# EAGLE board Boss DS1 (EAGLE 9.7.0)

Size 184.89 x 178.68 mm. Coordinates in mm from the lower left corner, seen from the top.
Outline: 0,0 184.89,0 184.89,178.68 0,178.68 0,0
Copper layers (1*16): Top 0.035mm / dielectric 1.5mm / Bottom 0.035mm
Design rules "default": minimum track width 6mil, minimum drill 0.35mm, track to track 6mil, track to pad 6mil, pad to pad 6mil, via to via 6mil, smd to smd 6mil, copper to edge 40mil, drill to drill 6mil, minimum pad ring 10mil, minimum via ring 8mil, stop-mask expansion 4mil, vias tented up to drill 0mil, thermal gap 10mil

## Footprints (pad centres in the part's own frame; a part is rotated, then mirrored left to right if it is on the bottom)
BATTERY-GENERIC = drill 1.118 pad 3.15 octagon: + 2.54,0; - -2.54,0
CAP-THRU-2.54MM = drill 1.016 pad 1.88: 1 -1.27,0; 2 1.27,0
DIODE-AXIAL = drill 1: 1 -5.08,0; 2 5.08,0
PIEZO = drill 1 pad 1.6: 1 -3.5,0; 2 3.5,0
RESAD1016W63L850D250B = drill 0.83 pad 1.43: 1 -5.08,0; 2 5.08,0
HA-06-SM065 = drill 1 pad 1.676: 1 -2.54,-2.54; 2 0,2.54; 3 2.54,-2.54
SWITCH-SPDT-PTH-8.5X3.7MM = drill 1.016 pad 1.88: 1 -2.54,0; 2 0,0; 3 2.54,0
TO92 = drill 0.813 octagon: 1 -1.27,0; 2 0,1.905; 3 1.27,0
DIP826W53P254L959H508Q8B = drill 0.786 pad 1.386: 1 -4.13,3.81; 2 -4.13,1.27; 3 -4.13,-1.27; 4 -4.13,-3.81; 5 4.13,-3.81; 6 4.13,-1.27; 7 4.13,1.27; 8 4.13,3.81
ARDUINO-UNO-R3-SHIELD = drill 1.016 pad 1.88: 3.3V 24.13,-2.54; 5V 24.13,0; A0 24.13,12.7; A1 24.13,15.24; A2 24.13,17.78; A3 24.13,20.32; A4 24.13,22.86; A5 24.13,25.4; AREF -24.13,-13.97; D2 -24.13,20.32; D3 -24.13,17.78; D4 -24.13,15.24; D5 -24.13,12.7; D6 -24.13,10.16; D7 -24.13,7.62; D8 -24.13,3.81; D9 -24.13,1.27; D10 -24.13,-1.27; D11 -24.13,-3.81; D12 -24.13,-6.35; D13 -24.13,-8.89; GND@0 24.13,2.54; GND@1 24.13,5.08; GND@2 -24.13,-11.43; IOREF 24.13,-7.62; NC 24.13,-10.16; RES 24.13,-5.08; RX -24.13,25.4; SCL -24.13,-19.05; SDA -24.13,-16.51; TX -24.13,22.86; VIN 24.13,7.62

## Placement (x,y rotation side)
BAT1  9V  [BATTERY-GENERIC]  176.64,108.72 270 top
C1  47n  [CAP-THRU-2.54MM]  48.37,92.21 0 top
C2  470n  [CAP-THRU-2.54MM]  58.53,92.21 0 top
C3  47n  [CAP-THRU-2.54MM]  61.07,99.83 0 top
C4  250p  [CAP-THRU-2.54MM]  73.77,97.29 0 top
C5  65n  [CAP-THRU-2.54MM]  83.93,92.21 0 top
C6  470n  [CAP-THRU-2.54MM]  147.43,97.29 0 top
C7  100p  [CAP-THRU-2.54MM]  129.65,89.67 0 top
C8  470n  [CAP-THRU-2.54MM]  48.99,14.05 0 top
C9  10n  [CAP-THRU-2.54MM]  61.69,14.05 0 top
C10  22n  [CAP-THRU-2.54MM]  64.23,34.37 0 top
C11  100n  [CAP-THRU-2.54MM]  71.85,21.67 0 top
C13  47n  [CAP-THRU-2.54MM]  104.87,21.67 0 top
C14  1u  [CAP-THRU-2.54MM]  127.73,19.13 0 top
CMAIN9  47u  [CAP-THRU-2.54MM]  172.83,89.67 0 top
D1  DIODEDIODE-AXIAL  [DIODE-AXIAL]  95.36,104.91 270 top
D2  DIODEDIODE-AXIAL  [DIODE-AXIAL]  60.42,19.13 270 top
D3  DIODEDIODE-AXIAL  [DIODE-AXIAL]  52.8,19.13 90 top
PIEZO2  PIEZO  [PIEZO]  135.35,19.13 0 top
R1  1k  [RESAD1016W63L850D250B]  42.02,89.67 0 top
R2  1k  [RESAD1016W63L850D250B]  49.64,84.59 90 top
R3  100k  [RESAD1016W63L850D250B]  59.8,84.59 90 top
R4  100k  [RESAD1016W63L850D250B]  62.34,104.91 90 top
R5  10k  [RESAD1016W63L850D250B]  57.26,104.91 90 top
R6  10k  [RESAD1016W63L850D250B]  64.88,102.37 90 top
R7  470k  [RESAD1016W63L850D250B]  77.58,92.21 0 top
R8  100k  [RESAD1016W63L850D250B]  85.2,84.59 90 top
R9  47k  [RESAD1016W63L850D250B]  90.28,94.75 0 top
R10  22  [RESAD1016W63L850D250B]  75.04,69.35 90 top
R11  1k  [RESAD1016W63L850D250B]  80.12,69.35 90 top
R12  3.3k  [RESAD1016W63L850D250B]  87.74,69.35 90 top
R13  10k  [RESAD1016W63L850D250B]  92.82,69.35 90 top
R14  100k  [RESAD1016W63L850D250B]  110.6,94.75 0 top
R15  100k  [RESAD1016W63L850D250B]  130.92,94.75 270 top
R16  1k  [RESAD1016W63L850D250B]  143.62,96.61 240 top
R17  1.5k  [RESAD1016W63L850D250B]  27.4,26.75 90 top
R18  2.2k  [RESAD1016W63L850D250B]  32.48,26.75 90 top
R19  3.3k  [RESAD1016W63L850D250B]  42.64,26.75 90 top
R20  4.7k  [RESAD1016W63L850D250B]  47.72,26.75 90 top
R21  2.2k  [RESAD1016W63L850D250B]  65.5,26.75 90 top
R22  6.8k  [RESAD1016W63L850D250B]  70.58,29.29 90 top
R23  6.8k  [RESAD1016W63L850D250B]  80.74,8.97 90 top
R24  10k  [RESAD1016W63L850D250B]  95.98,19.13 0 top
R25  100k  [RESAD1016W63L850D250B]  106.14,8.97 90 top
R26  10k  [RESAD1016W63L850D250B]  116.3,11.51 90 top
R27  1k  [RESAD1016W63L850D250B]  121.38,19.13 0 top
R28  100k  [RESAD1016W63L850D250B]  129,11.51 90 top
RMAIN1  10k  [RESAD1016W63L850D250B]  174.1,102.37 90 top
RMAIN2  10k  [RESAD1016W63L850D250B]  169.02,97.29 0 top
RPOT1  100k  [HA-06-SM065]  138.54,97.29 0 top
RPOT2  20k  [HA-06-SM065]  78.2,21.67 0 top
RPOT4  100k  [HA-06-SM065]  90.9,21.67 0 top
S1  TOGGLE  [SWITCH-SPDT-PTH-8.5X3.7MM]  34.4,92.21 0 top
S2  TOGGLE  [SWITCH-SPDT-PTH-8.5X3.7MM]  69.96,82.05 0 top
S3  TOGGLE  [SWITCH-SPDT-PTH-8.5X3.7MM]  77.58,74.43 0 top
S4  TOGGLE  [SWITCH-SPDT-PTH-8.5X3.7MM]  90.28,74.43 0 top
S5  TOGGLE  [SWITCH-SPDT-PTH-8.5X3.7MM]  37.56,41.99 0 top
S6  TOGGLE  [SWITCH-SPDT-PTH-8.5X3.7MM]  29.94,41.99 0 top
S7  TOGGLE  [SWITCH-SPDT-PTH-8.5X3.7MM]  45.18,41.99 0 top
T1  NPN  [TO92]  54.72,99.83 0 top
T2  NPN  [TO92]  67.42,99.83 0 top
T3  NPN  [TO92]  113.76,21.67 0 top
U1  OPAMP_DIP  [DIP826W53P254L959H508Q8B]  104.25,85.86 90 top
U2  OPAMP_DIP  [DIP826W53P254L959H508Q8B]  122.03,85.86 90 top
U3  ARDUINO-UNO-R3-SHIELD  [ARDUINO-UNO-R3-SHIELD]  34.52,148.83 90 top

## Library data of the parts
BAT1 C1-C11 C13 C14 CMAIN9 D1-D3 PIEZO2 R1-R28 RMAIN1 RMAIN2 RPOT1 RPOT2 RPOT4 S1-S7 U1-U3 = Tinkercad
T1-T3 = Tinkercad; CATEGORY: Transistor; SUB-CATEGORY: BJT; TYPE: NPN

## Nets
BAT1+: BAT1.+ R6.2 RMAIN1.2 T1.1 T3.1 U1.7 U2.7
BAT1-: BAT1.- C6.2 C9.2 CMAIN9.1 D1.1 PIEZO2.2 R4.2 R5.2 R10.1 R11.1 R12.1 R13.1 R26.1 R28.1 RMAIN2.1 U1.4 U2.4 U3.GND@0 U3.GND@1 U3.GND@2
C2_2: C2.2 C3.1 R3.2
C4_2: C4.2 C5.1 R7.2
C7_2: C7.2 R15.2 RPOT1.2
C11_1: C11.1 RPOT2.1
C13_1: C13.1 R24.2
R1_2: C1.1 R1.2
R8_2: C5.2 R8.2 R9.1
R16_1: C6.1 R16.1
R20_1: C8.1 R17.1 R18.1 R19.1 R20.1
R21_2: C10.2 R21.2
R27_2: C14.1 R27.2
RPOT1_P$3: R16.2 RPOT1.3
RPOT2_P$2: RPOT2.2 RPOT4.3
RPOT2_P$3: R21.1 R23.2 RPOT2.3
RPOT4_P$2: R24.1 RPOT4.2
S1_O: C14.2 PIEZO2.1 R28.2 S1.1
S1_S: R1.1 S1.3
S2_O: S2.1 S3.2
S2_P: S2.2 T2.3
S2_S: S2.3 S4.2
S3_O: R10.2 S3.1
S3_S: R11.2 S3.3
S4_O: R12.2 S4.1
S4_S: R13.2 S4.3
S5_O: S5.1 S6.2
S6_O: R17.2 S6.1
S6_S: R18.2 S6.3
S7_O: R19.2 S7.1
S7_P: S5.3 S7.2
S7_S: R20.2 S7.3
T1_B: C1.2 R2.2 T1.2
T1_E: C2.1 R5.1 T1.3
T2_B: C3.2 R4.1 T2.2
T2_C: C4.1 R6.1 R7.1 T2.1
T3_B: C13.2 R25.2 T3.2
T3_E: R26.2 R27.1 T3.3
U1_-IN: D1.2 R9.2 R14.2 U1.2
U1_OUT: R14.1 U1.6
U2_+IN: C8.2 C9.1 C10.1 C11.2 CMAIN9.2 D2.1 D2.2 D3.1 D3.2 R2.1 R3.1 R8.1 R22.2 R23.1 R25.1 RMAIN1.1 RMAIN2.2 RPOT4.1 U1.3 U2.3
U2_-IN: R15.1 U2.2
U2_OUT: C7.1 RPOT1.1 S5.2 U2.6
U3_D6: S1.2 U3.D6 U3.D7 U3.D8

## Tracks (layer width: path | path; a pad name or v marks a point on that pad's centre or on a via)
BAT1+  (6 unrouted)
BAT1-  (19 unrouted)
C2_2  (2 unrouted)
C4_2  (2 unrouted)
C7_2  (2 unrouted)
C11_1  (1 unrouted)
C13_1  (1 unrouted)
R1_2  (1 unrouted)
R8_2  (2 unrouted)
R16_1  (1 unrouted)
R20_1  (4 unrouted)
R21_2  (1 unrouted)
R27_2  (1 unrouted)
RPOT1_P$3  (1 unrouted)
RPOT2_P$2  (1 unrouted)
RPOT2_P$3  (2 unrouted)
RPOT4_P$2  (1 unrouted)
S1_O  (3 unrouted)
S1_S  (1 unrouted)
S2_O  (1 unrouted)
S2_P  (1 unrouted)
S2_S  (1 unrouted)
S3_O  (1 unrouted)
S3_S  (1 unrouted)
S4_O  (1 unrouted)
S4_S  (1 unrouted)
S5_O  (1 unrouted)
S6_O  (1 unrouted)
S6_S  (1 unrouted)
S7_O  (1 unrouted)
S7_P  (1 unrouted)
S7_S  (1 unrouted)
T1_B  (2 unrouted)
T1_E  (2 unrouted)
T2_B  (2 unrouted)
T2_C  (3 unrouted)
T3_B  (2 unrouted)
T3_E  (2 unrouted)
U1_-IN  (3 unrouted)
U1_OUT  (1 unrouted)
U2_+IN  (19 unrouted)
U2_-IN  (1 unrouted)
U2_OUT  (3 unrouted)
U3_D6  (3 unrouted)